# Altium PCB LTD-SX1280 CPU V1.0.PcbDoc
Units mm, origin at the board's own origin, x right, y up, seen from the top; angles counter-clockwise.
Board outline 101.73 x 68.33 mm, 2 copper layers (Top Layer, Bottom Layer); 63 components, 80 nets, 279 pads, 92 vias.
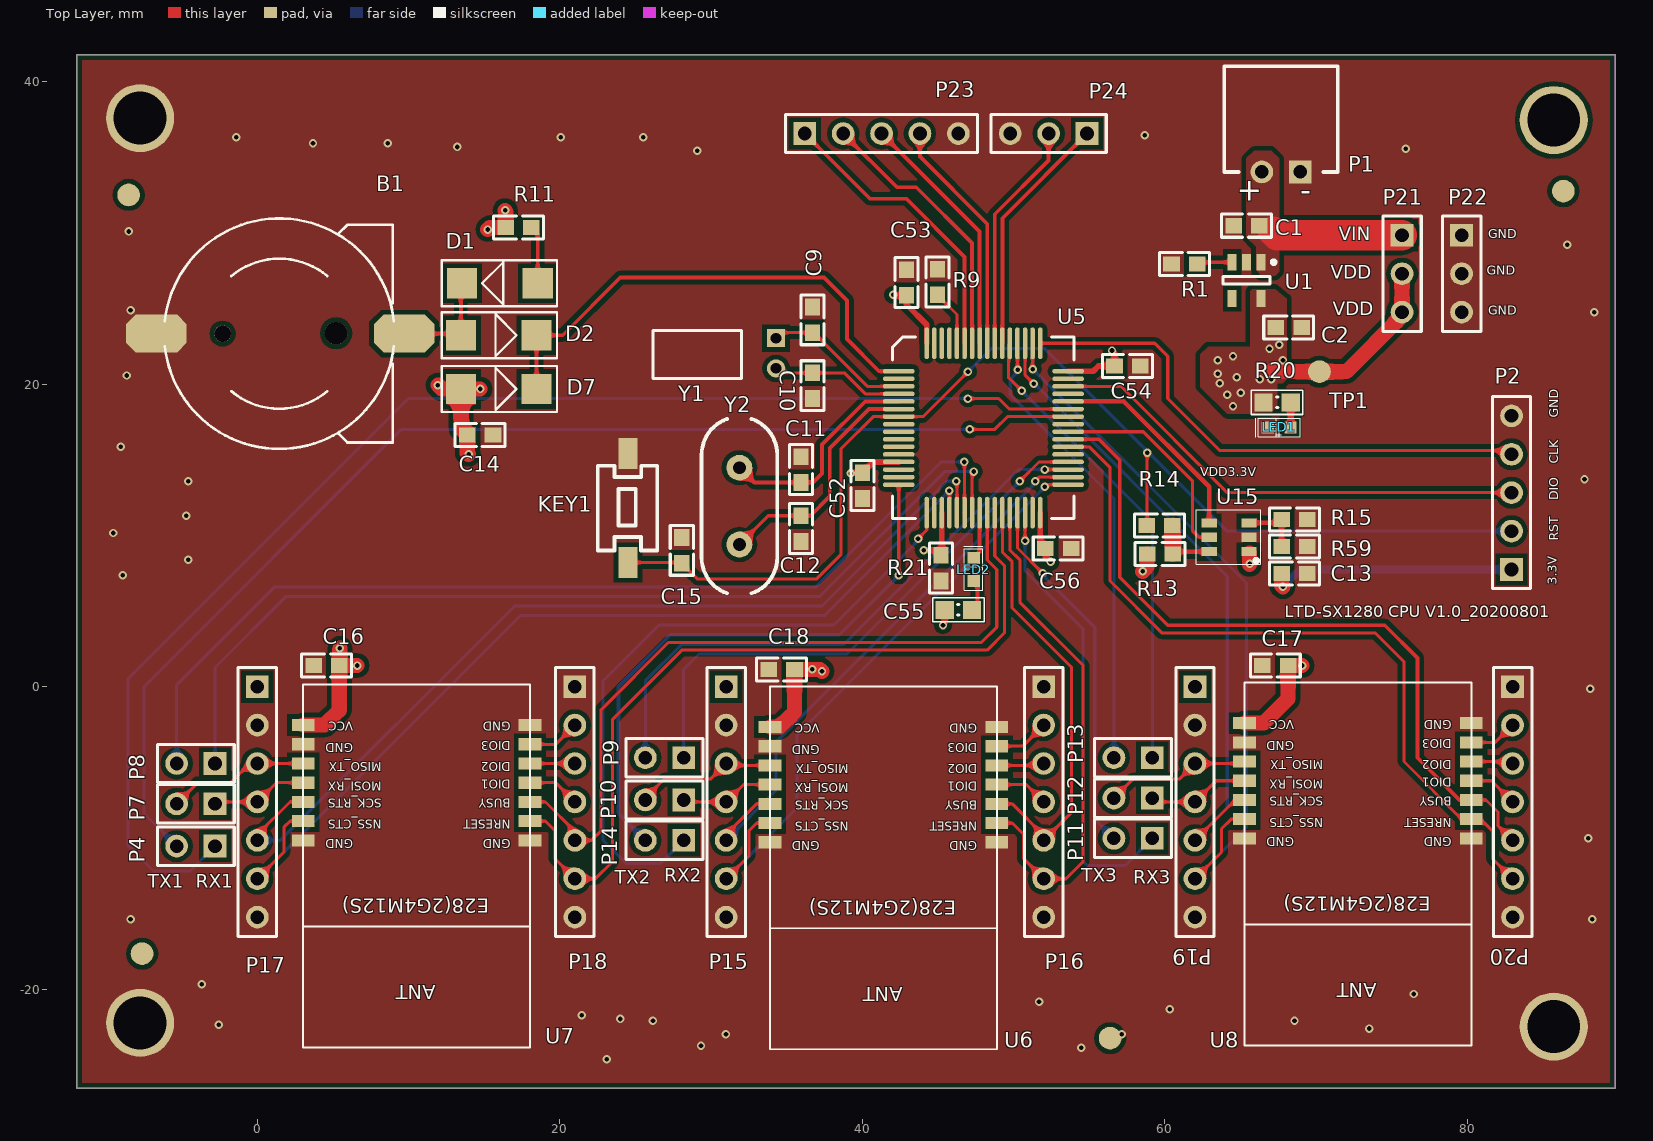
[diagram p0: Top Layer view]
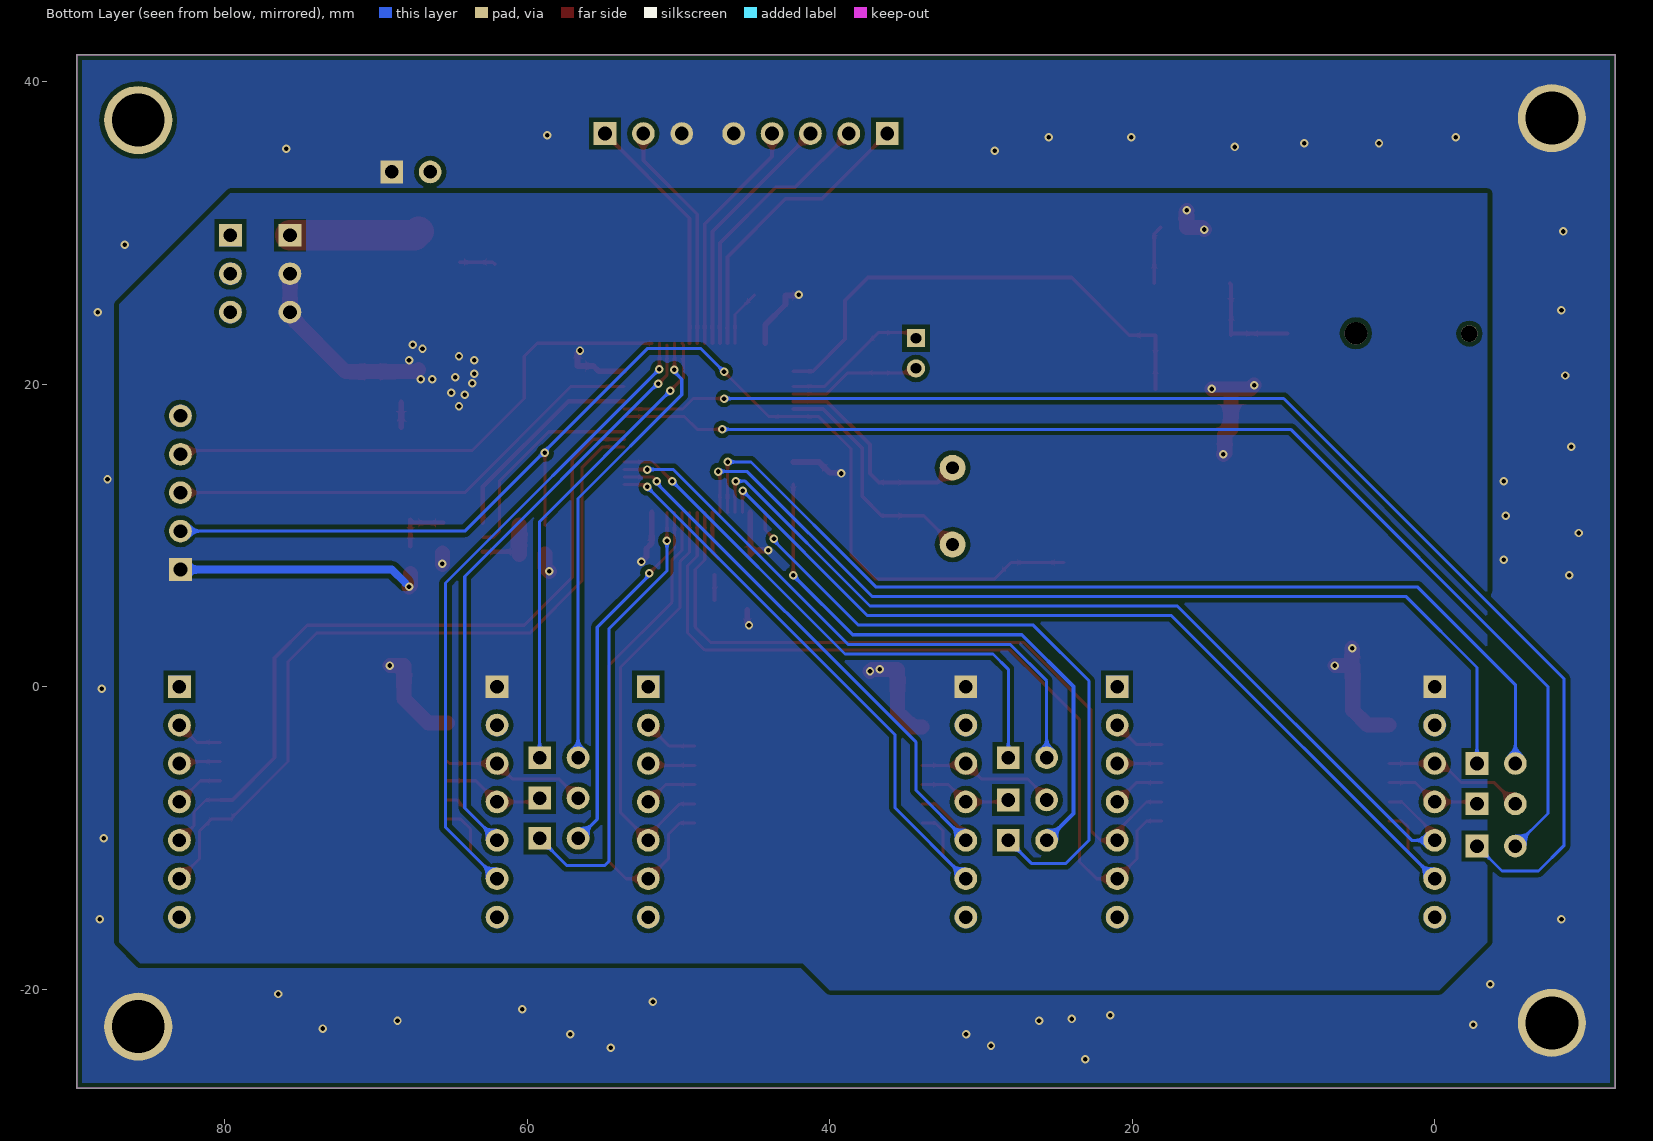
[diagram p1: Bottom Layer view, seen from below]

## Layer stack, top to bottom
Top Solder: solder mask 0.0102, Solder Resist, Dk 3.5
Top Layer: signal copper 0.0356
Dielectric1: core 0.32, FR-4, Dk 4.8
Bottom Layer: signal copper 0.0356
Bottom Solder: solder mask 0.0102, Solder Resist, Dk 3.5

## Board outline
-11.938,-26.543 -11.938,41.783 89.789,41.783 89.789,-26.543

## Design rules (kind name [scope] priority, off if disabled: settings)
Clearance [All] p1: gap=0.1 ignorepadtopadclearanceinfootprint=FALSE except(0: Arc-Hole Track-Hole SMDPad-Hole THPad-Hole Via-Hole Fill-Hole Poly-Hole Region-Hole Text-Hole)
ComponentClearance [All] p1: gap=0 collisioncheckmode=3 verticalgap=0 showdistances=FALSE
HoleSize [All] p1: absolutevalues=TRUE maxlimit=5.08 minlimit=0.025 maxpercent=80.000 minpercent=20.000
HoleToHoleClearance [All] p1: gap=0 allowstackedmicrovias=TRUE
MinimumSolderMaskSliver [All] p1: minsoldermaskwidth=0
PlaneConnect [All] p1: planeconnectstyle=Direct reliefexpansion=0.508 reliefentries=4 reliefconductorwidth=0.254 reliefairgap=0.254
PolygonConnect PolygonConnect_1 [isvia] p1: connectstyle=Direct reliefconductorwidth=0.254 reliefentries=4 polygonreliefangle="90 Angle" airgapwidth=0.254
PolygonConnect [All] p2: connectstyle=Direct reliefconductorwidth=0.254 reliefentries=4 polygonreliefangle="90 Angle" airgapwidth=0.254
RoutingVias [All] p1: holewidth=0.711 width=1.27 viastyle="Through Hole" minholewidth=0.711 minwidth=1.27 maxholewidth=0.711 maxwidth=1.27
SilkToSilkClearance [All] p1: silktosilkclearance=0
SilkToSolderMaskClearance [IsPad] p1: minsilkscreentomaskgap=0 clearancetoexposedcopper=TRUE
SolderMaskExpansion [All] p1: expansion=0.102 istentingtop=FALSE
Width [All] p1: maxlimit=2.54 minlimit=0.203 preferedwidth=0.203 minimp=50.000000 maximp=50.000000 favimp=50.000000
23 further rules are at their usual default settings.

## Classes and differential pairs
component class POWER: C1 C2 P1 R1 TP1 U1
component class CPU: B1 C9 C10 C11 C12 C13 C14 C15 C52 C53 C54 C55 C56 D1 D2 D7 KEY1 LED1 LED2 P2 P21 P22 P23 P24 R9 R11 R13 R14 R15 R20 R21 R59 U5 U15 Y1 Y2
component class IO&RF: C16 C17 C18 P4 P7 P8 P9 P10 P11 P12 P13 P14 P15 P16 P17 P18 P19 P20 U6 U7 U8

## Components (designator, comment, footprint, x,y, rotation, side; value= is the part's Value field where it differs from the comment)
B1 "*" LI1220_1 1.457,23.343 r0 top
C1 "1uF/0603/25V" 0603 65.405,30.48 r180 top
C2 "10uF/0603/16V" 0603 68.199,23.749 r0 top
C9 "12pF/0603/50V" 0603 36.703,24.257 r270 top
C10 "12pF/0603/50V" 0603 36.703,19.9 r90 top
C11 "22pF/0603/50V" 0603 35.941,14.351 r270 top
C12 "22pF/0603/50V" 0603 35.941,10.453 r90 top
C13 "0.1uF/0603/50V" 0603 68.58,7.493 r0 top
C14 "0.1uF/0603/50V" 0603 14.732,16.637 r180 top
C15 "0.1uF/0603/50V" 0603 28.067,9.017 r270 top
C16 "0.1uF/0603/50V" 0603 4.572,1.397 r0 top
C17 "0.1uF/0603/50V" 0603 67.31,1.397 r180 top
C18 "0.1uF/0603/50V" 0603 34.671,1.143 r180 top
C52 "0.1uF/0603/50V" 0603 40.005,13.296 r90 top
C53 "0.1uF/0603/50V" 0603 42.933,26.721 r270 top
C54 "0.1uF/0603/50V" 0603 57.531,21.209 r180 top
C55 "0.1uF/0603/50V" 0603 45.219,7.837 r90 top
C56 "0.1uF/0603/50V" 0603 52.959,9.144 r180 top
D1 "B240A/DO-214AC" DO-214AC 18.542,26.67 r180 top
D2 "B240A/DO-214AC" DO-214AC 13.462,23.241 r0 top
D7 "B240A/DO-214AC" DO-214AC 13.462,19.685 r0 top
KEY1 "*" KEY-3X6mm 24.511,11.811 r270 top
LED1 "LED-RED" LED-0603 67.564,17.145 r180 top
LED2 "LED-RED" LED-0603 47.371,7.747 r90 top
P1 "BAT" 白色连接器2.54 68.961,34.036 r180 top
P2 "*" HDR1X5 82.931,7.747 r90 top
P4 "Header 2" HDR1X2 -2.794,-10.541 r180 top
P7 "Header 2" HDR1X2 -2.794,-7.747 r180 top
P8 "Header 2" HDR1X2 -2.794,-5.08 r180 top
P9 "Header 2" HDR1X2 28.194,-4.699 r180 top
P10 "Header 2" HDR1X2 28.194,-7.493 r180 top
P11 "Header 2" HDR1X2 59.182,-10.033 r180 top
P12 "Header 2" HDR1X2 59.182,-7.366 r180 top
P13 "Header 2" HDR1X2 59.182,-4.699 r180 top
P14 "Header 2" HDR1X2 28.194,-10.16 r180 top
P15 "Header 7" HDR1X7 31,0 r270 top
P16 "Header 7" HDR1X7 52,0 r270 top
P17 "Header 7" HDR1X7 0,0 r270 top
P18 "Header 7" HDR1X7 21,0 r270 top
P19 "Header 7" HDR1X7 62,0 r270 top
P20 "Header 7" HDR1X7 83,0 r270 top
P21 "Header 3" HDR1X3 75.692,29.845 r270 top
P22 "Header 3" HDR1X3 79.629,29.845 r270 top
P23 "Header 3" HDR1X3 54.864,36.576 r180 top
P24 "*" HDR1X5 36.195,36.576 r0 top
R1 "10K/0603/1%" 0603 61.302,27.94 r0 top
R9 "510R/0603/1%" 0603 44.965,26.76 r90 top
R11 "10K/0603/1%" 0603 17.272,30.353 r0 top
R13 "100k/0603/1%" 0603 59.69,8.763 r180 top
R14 "0R/0603/1%" 0603 59.651,10.668 r0 top
R15 "340k/0603/1%" 0603 68.58,11.049 r180 top
R20 "1K" R-0603 67.437,18.796 r0 top
R21 "1K" R-0603 46.355,5.08 r0 top
R59 "340k/0603/1%" 0603 68.58,9.271 r180 top
TP1 "TP-1.2mm" TP-1.2MM 70.231,20.828 r0 top
U1 "TPS76933DBVT" TI-DBV5_N 65.405,26.867 r270 top
U5 "STM32L476RGT6" LQFP-64-10X10-0.5 48.013,17.108 r0 top locked
U6 "SX1280" PE28(2G4M12S) 41.402,-6.477 r270 top
U7 "SX1280" PE28(2G4M12S) 10.534,-6.35 r270 top
U8 "SX1280" PE28(2G4M12S) 72.771,-6.223 r270 top
U15 "TPL5010/SOT23" SOT23-6 64.196,9.882 r180 top
Y1 "32.768kHZ" 32.768K 34.297,23.045 r0 top
Y2 "8MHZ-5032" XAL 31.877,9.398 r270 top

## Footprints (in the part's own frame and the unit in brackets; to place one, negate y for a bottom-side part, rotate by r counter-clockwise, add the part's x,y. Pads: shape width x height; smd on the part's side, far side on the other; paste and mask are expansions set on the pad)
32.768K [mm]
  rect 1.2x1.2 / inner round 1.2 / far side rect 1.2x1.2 hole 0.7: 1(0,0)
  round 1.2 hole 0.7: 2(0,-2)
  silkscreen extent -8.13,-2.67 -2.29,0.51
0603 [mm] "Chip Resistor; Body 1.6 x 0.8 mm (LxW typ)"
  rect 1.1x1 smd: 1(-0.85,0) 2(0.85,0)
  silkscreen extent -1.65,-0.76 1.65,0.76
DO-214AC [mm]
  rect 2x2 smd: 1(0,0) 2(5,0)
  silkscreen extent -1.27,-1.52 6.35,1.52
HDR1X2 [mm] "Connector; Header; 2 Position"
  rect 1.5x1.5 hole 0.9: 1(0,0)
  round 1.5 hole 0.9: 2(2.54,0)
  silkscreen extent -1.27,-1.27 3.81,1.27
HDR1X3 [mm] "Connector; Header; 3 Position"
  rect 1.5x1.5 hole 0.9: 1(0,0)
  round 1.5 hole 0.9: 2(2.54,0) 3(5.08,0)
  silkscreen extent -1.27,-1.27 6.35,1.27
HDR1X5 [mm] "Connector; Header; 5 Position"
  rect 1.5x1.5 hole 0.9: 1(0,0)
  round 1.5 hole 0.9: 2(2.54,0) 3(5.08,0) 4(7.62,0) 5(10.16,0)
  silkscreen extent -1.27,-1.27 11.43,1.27
HDR1X7 [mm] "Connector; Header; 7 Position"
  rect 1.5x1.5 hole 0.9: 1(0,0)
  round 1.5 hole 0.9: 2(2.54,0) 3(5.08,0) 4(7.62,0) 5(10.16,0) 6(12.7,0) 7(15.24,0)
  silkscreen extent -1.27,-1.27 16.51,1.27
KEY-3X6mm [mm] "3X6mm"
  rect 2.032x1.27 smd: 1(-3.6,0) 2(3.6,0)
  silkscreen extent -2.8,-2 2.8,1.94, body extent -3.54,-1.83 3.48,1.87, height 2.5
LED-0603 [mm] "1.6*0.8mm"
  rect 0.8x0.8 smd: 1(-0.75,0) 2(0.75,0)
  silkscreen extent -1.38,-0.61 1.55,0.65
LI1220_1 [mm]
  round 1.1 hole 1.1 unplated: 0(-3.75,0)
  round 1.5 hole 1.5 unplated: 0(3.75,0.025)
  oct 4x2.5 smd: 1(8.255,0) 2(-8.128,0)
  silkscreen extent -7.57,-7.62 7.57,7.62
LQFP-64-10X10-0.5 [mm] "Pinch=0.5mm,Height=1.6mm,Body=10X10mm"
  oval 2.1x0.3 smd: 1(-5.6,3.75) 2(-5.6,3.25) 3(-5.6,2.75) 4(-5.6,2.25) 5(-5.6,1.75) 6(-5.6,1.25) 7(-5.6,0.75) 8(-5.6,0.25) 9(-5.6,-0.25) 10(-5.6,-0.75) 11(-5.6,-1.25) 12(-5.6,-1.75) 13(-5.6,-2.25) 14(-5.6,-2.75) 15(-5.6,-3.25) 16(-5.6,-3.75) 33(5.6,-3.75) 34(5.6,-3.25) 35(5.6,-2.75) 36(5.6,-2.25) 37(5.6,-1.75) 38(5.6,-1.25) 39(5.6,-0.75) 40(5.6,-0.25) 41(5.6,0.25) 42(5.6,0.75) 43(5.6,1.25) 44(5.6,1.75) 45(5.6,2.25) 46(5.6,2.75) 47(5.6,3.25) 48(5.6,3.75)
  oval 0.3x2.1 smd: 17(-3.75,-5.6) 18(-3.25,-5.6) 19(-2.75,-5.6) 20(-2.25,-5.6) 21(-1.75,-5.6) 22(-1.25,-5.6) 23(-0.75,-5.6) 24(-0.25,-5.6) 25(0.25,-5.6) 26(0.75,-5.6) 27(1.25,-5.6) 28(1.75,-5.6) 29(2.25,-5.6) 30(2.75,-5.6) 31(3.25,-5.6) 32(3.75,-5.6) 49(3.75,5.6) 50(3.25,5.6) 51(2.75,5.6) 52(2.25,5.6) 53(1.75,5.6) 54(1.25,5.6) 55(0.75,5.6) 56(0.25,5.6) 57(-0.25,5.6) 58(-0.75,5.6) 59(-1.25,5.6) 60(-1.75,5.6) 61(-2.25,5.6) 62(-2.75,5.6) 63(-3.25,5.6) 64(-3.75,5.6)
  silkscreen extent -6,-6 6,6, body extent -6.07,-6.07 6.07,6.07, height 1.63
PE28(2G4M12S) [mm] "24mm*15mm*2.85mm-S"
  rect 0.8x1.5 smd: 1(-3.81,-7.5) 2(-2.54,-7.5) 3(-1.27,-7.5) 4(0,-7.5) 5(1.27,-7.5) 6(2.54,-7.5) 7(3.81,-7.5) 8(3.81,7.5) 9(2.54,7.5) 10(1.27,7.5) 11(0,7.5) 12(-1.27,7.5) 13(-2.54,7.5) 14(-3.81,7.5)
  silkscreen extent -6.5,-7.5 17.5,7.5
R-0603 [mm] "Chip, 2-Leads, Body 1.60x0.80mm, IPC Medium Density"
  rect 1.2x1.2 smd: 1(-0.9,0) 2(0.9,0)
  silkscreen extent -1.7,-0.8 1.7,0.8, body extent -0.8,-0.4 0.8,0.4, height 0.8
SOT23-6 [mm]
  rect 1x0.6 smd: 1(-1.375,0.95) 2(-1.375,0) 3(-1.375,-0.95) 4(1.255,-0.95) 5(1.255,0) 6(1.255,0.95)
  silkscreen extent -2.13,-1.8 2.12,1.8, body extent -0.88,-1.52 0.88,1.53, height 1.1
TI-DBV5_N [mm] "SOT23, 5-Leads, Body 2.9x1.6mm, Pitch 0.95mm, IPC Medium Density"
  rect 1.1x0.6 smd: 1(-1.2,0.95) 2(-1.2,0) 3(-1.2,-0.95) 4(1.2,-0.95) 5(1.2,0.95)
  silkscreen extent -1.32,-1.55 0.25,1.93, body extent -0.88,-1.52 0.87,1.53, height 1.45
TP-1.2MM [mm]
  round 1.5 smd: 1(0,0)
XAL [mm]
  round 1.708 hole 0.854: 1(0,0) 2(-5.08,0)
  silkscreen extent -8.31,-2.5 3.23,2.5
白色连接器2.54 [mm]
  rect 1.5x1.5 hole 0.9: 1(0,0)
  round 1.5 hole 0.9: 2(2.54,0)
  silkscreen extent -2.48,-6.98 5.02,0

## Part data
B1: library part VBAT
C1 C2 C9 C10 C11 C12 C13 C16: library part CAP, "Capacitor"
C14 C15 C17 C18 C52 C53 C54 C55 C56: library part Cap, "Capacitor"
D1 D2 D7: library part DIODE, "Diode"
KEY1: library part SW-PB, "Switch"
LED1 LED2: library part LED-RED-0603, "LED-RED,5V,30mA,90mW,1.6*0.8mm"
P1: library part "Header 2", "Header, 2-Pin"
P2 P24: library part "Header 5", "Header, 5-Pin"
P4 P7 P8 P9 P10 P11 P12 P13 P14: "Header, 2-Pin"
P15 P16 P17 P18 P19 P20: "Header, 7-Pin"
P21 P22 P23: "Header, 3-Pin"
R1 R13 R14 R15 R59: library part RES
R9: library part RES, "Resistor"
R11: library part "Res Semi", "Semiconductor Resistor"
R20 R21: library part RES-1K-1%-0603, "RES,1K,1/10W,1%,0603"
U1: "Single Output LDO, 100 mA, Fixed 3.3 V Output, 2.7 to 10 V Input, with Low IQ, 5-pin SOT-23 (DBV), -40 to 125 degC, Green (RoHS & no Sb/Br)"
U5: library part STM32L476R
U15: library part TPL5
Y1 Y2: library part CRYSTAL, "Crystal"

## Free pads (board coordinates)
  round 1.5 smd: 0(-8.509,32.512) 1(-7.62,-17.653) 2(86.36,32.766) 3(56.388,-23.241)
  round 4.5 hole 3.5: 0(-7.747,-22.225) 0(-7.747,37.592) 0(85.725,-22.479) 0(85.725,37.465)

## Via types
v1: diameter 0.559, hole 0.305, Top Layer to Bottom Layer, tented both sides, 92 vias

## Nets (pads, with @x,y where several pads share a name; then routed paths per layer and width w, separated by ;. In a path a pad name is that pad's centre, name@x,y a point inside that pad or via, vN(x,y) a via of type N, cw(c..) or ccw(c..) an arc to the next point about the centre after c; other vN are vias at no path point)
5V_EN: U5.45
AE_ADC: U5.10
BUSY1: P18.5 U5.25 U7.10 | length 50.6
  Top Layer w0.203: U7.10 19.05,-7.62 21,-9.57 P18.5 22.098,-10.16 22.733,-9.525 22.733,-1.524 27.178,2.921 47.879,2.921 48.895,3.937 48.895,7.747 48.263,8.379 U5.25
BUSY2: P16.5 U5.27 U6.10 | length 28.6
  Top Layer w0.203: U6.10 49.911,-7.747 52,-9.836 P16.5 53.848,-8.312 53.848,1.27 49.911,5.207 49.911,8.255 49.263,8.903 U5.27
BUSY3: P20.5 U5.39 U8.10 | length 49.3
  Top Layer w0.203: U8.10 81.244,-7.493 82.042,-8.291 82.042,-9.202 P20.5
  Top Layer w0.254: U5.39 55.651,16.358 57.023,14.986 57.023,7.239 60.198,4.064 74.549,4.064 76.708,1.905 76.708,-4.699 79.502,-7.493 U8.10
DI01: P16.4 U6.11 | length 3.6
  Top Layer w0.203: U6.11 50.857,-6.477 P16.4
DI02: P16.3 U6.12 | length 3.2
  Top Layer w0.203: U6.12 51.873,-5.207 P16.3
DI03: P16.2 U6.13 | length 3.7
  Top Layer w0.203: U6.13 50.603,-3.937 P16.2
DI04: P18.4 U7.11 | length 3.5
  Top Layer w0.203: U7.11 19.73,-6.35 P18.4
DI05: P18.3 U7.12 | length 3
  Top Layer w0.203: U7.12 P18.3
DI06: P18.2 U7.13 | length 3.5
  Top Layer w0.203: U7.13 19.73,-3.81 P18.2
DI07: P20.4 U8.11 | length 3.3
  Top Layer w0.203: U8.11 81.603,-6.223 P20.4
DI08: P20.3 U8.12 | length 2.8
  Top Layer w0.203: U8.12 82.873,-4.953 P20.3
DI09: P20.2 U8.13 | length 3.2
  Top Layer w0.203: U8.13 81.857,-3.683 P20.2
EEPROM_POWER_ON: U5.37
GND: B1.2 C1.2 C2.2 C9.1 C10.1 C11.1 C12.1 C13.2 C14.1 C15.1 C16.1 C17.2 C18.2 C52.1 C53.1 C54.1 C55.1 C56.1 KEY1.1 LED1.2 P1.1 P2.5 P15.2 P15.7 P16.1 P16.7 P17.2 P17.7 P18.1 P18.7 P19.2 P19.7 P20.1 P20.7 P22.1 P22.2 P22.3 P23.3 P24.5 pad.0@85.725,-22.479 pad.0@-7.747,37.592 pad.0@-7.747,-22.225 R1.1 R9.2 R15.1 R59.1 U1.2 U5.12 U5.18 U5.31 U5.47 U5.63 U6.2 U6.7 U6.8 U6.14 U7.2 U7.7 U7.8 U7.14 U8.2 U8.7 U8.8 U8.14 U15.2
  other v1: 23.114,-24.638 54.483,-23.876 29.337,-23.749 30.988,-22.987 57.15,-22.987 73.533,-22.606 -2.54,-22.352 26.162,-22.098 68.58,-22.098 24.003,-21.971 21.463,-21.717 60.325,-21.336 51.689,-20.828 76.454,-20.32 -3.683,-19.685 -8.382,-15.367 88.265,-15.367 88.011,-10.033 88.138,-0.127 -8.89,7.366 -4.572,8.382 -9.525,10.16 -4.699,11.303 -4.572,13.589 87.757,13.716 -9.017,15.875 -8.636,20.574 88.392,24.765 -8.382,24.892 86.614,29.21 -8.509,30.099 29.083,35.433 75.946,35.56 13.208,35.687 3.683,35.941 8.636,35.941 -1.397,36.322 20.066,36.322 25.527,36.322 58.674,36.449
KEY_START: U5.2
KEY_STOP: U5.14
LED: LED2.2 U5.24 | length 3.2
  Top Layer w0.254: LED2.2 47.763,8.889 U5.24
LORA_AT: U5.62
MCU_3.3V: C2.1 C13.1 C14.2 C16.2 C17.1 C18.1 C52.2 C53.2 C54.2 C55.2 C56.2 D7.1 P2.1 P15.1 P17.1 P19.1 P21.2 P21.3 R11.1 R13.2 R20.1 R21.1 TP1.1 U1.5 U5.13 U5.19 U5.32 U5.48 U5.64 U6.1 U7.1 U8.1 U15.1 | length 83.5
  Top Layer w0.381: v1(39.243,14.097) 39.292,14.146 C52.2 40.717,14.858 U5.13 ; v1(42.037,25.908) 42.074,25.871 C53.2 42.933,25.266 44.263,23.936 U5.64 ; v1(44.069,9.017) 44.977,9.017 45.263,8.731 U5.19 ; v1(45.339,4.064) 45.455,4.18 R21.1 ; U5.32 51.763,9.49 C56.2 52.109,8.597 v1(52.451,8.255) ; U5.48 55.275,20.858 55.626,21.209 C54.2 56.681,22.059 v1(56.515,22.225)
  Top Layer w1: U7.1 4.445,-2.54 5.422,-1.563 C16.2 ; v1(5.461,2.54) 5.461,1.436 C16.2 ; v1(6.604,1.397) C16.2 ; v1(11.938,19.939) 12.192,19.685 D7.1 ; v1(13.97,15.367) 13.882,15.455 C14.2 13.462,17.057 D7.1 ; v1(14.732,19.685) D7.1 ; v1(15.24,30.226) 15.367,30.353 R11.1 16.422,31.457 v1(16.383,31.496) ; U6.1 34.544,-2.667 35.521,-1.69 C18.1 37.211,1.143 v1(37.338,1.016) ; v1(58.547,7.62) 58.84,7.913 R13.2 ; U8.1 66.548,-2.413 68.16,-0.801 C17.1 v1(69.088,1.397) ; v1@65.61,8.082 U15.1@65.61,8.847 ; 67.183,20.955 67.31,20.828 TP1.1 72.009,20.828 75.692,24.511 P21.3 P21.2 ; C13.1 67.73,6.692 v1(67.818,6.604)
  Bottom Layer w0.508: 68.072,6.858 68.961,7.747 P2.1
  other v1: 36.703,1.143 65.61,8.128 64.516,18.542 64.135,19.304 65.024,19.431 63.627,20.066 66.294,20.32 67.056,20.32 64.77,20.447 63.5,20.701 63.5,21.59 67.818,21.59 64.516,21.844 66.929,22.352 67.564,22.606
MISI_RX1: P7.1 P17.4 U7.4 | length 6.4
  Top Layer w0.203: P7.1 -2.667,-7.62 P17.4 1.27,-6.35 U7.4
MISI_RX2: P10.1 P15.4 U6.4 | length 6.2
  Top Layer w0.203: P10.1 28.321,-7.62 P15.4 32.143,-6.477 U6.4
MISI_RX3: P12.1 P19.4 U8.4 | length 6.8
  Top Layer w0.203: P12.1@59.055,-7.62 P19.4 63.397,-6.223 U8.4
MISO_TX1: P7.2 P17.3 U7.3 | length 9.5
  Top Layer w0.203: P7.2 -3.937,-6.35 -1.778,-6.35 -0.508,-5.08 P17.3 U7.3
MISO_TX2: P10.2 P15.3 U6.3 | length 9.4
  Top Layer w0.203: P10.2 25.654,-7.366 26.924,-6.096 29.984,-6.096 P15.3 31.127,-5.207 U6.3
MISO_TX3: P12.2 P19.3 U8.3 | length 9.6
  Top Layer w0.203: P12.2 57.912,-6.096 60.984,-6.096 P19.3 65.144,-5.08 U8.3
NetB1_1: B1.1 D1.2 D2.1 | length 7.3
  Top Layer w0.254: B1.1 13.36,23.343 D2.1 13.462,26.59 D1.2
NetC9_2: C9.2 U5.3 Y1.1 | length 9.7
  Top Layer w0.203: Y1.1 34.659,23.407 C9.2 36.791,23.407 40.34,19.858 U5.3
NetC10_2: C10.2 U5.4 Y1.2 | length 8.8
  Top Layer w0.203: Y1.2 34.592,20.75 C10.2 38.813,20.75 40.205,19.358 U5.4
NetC11_2: C11.2 U5.5 Y2.2 | length 14.3
  Top Layer w0.254: Y2.2 32.854,13.501 C11.2 36.742,13.501 37.338,14.097 37.338,16.002 40.194,18.858 U5.5
NetC12_2: C12.2 U5.6 Y2.1 | length 16.1
  Top Layer w0.254: Y2.1 33.782,11.303 C12.2 36.576,11.303 37.846,12.573 37.846,15.748 40.456,18.358 U5.6
NetD1_1: D1.1 R11.2 | length 3.9
  Top Layer w0.254: R11.2 18.542,29.933 D1.1
NetLED1_1: LED1.1 R20.2 | length 1.6
  Top Layer w0.381: LED1.1@68.337,17.168 R20.2
NetLED2_1: LED2.1 R21.2 | length 1.6
  Top Layer w0.254: 47.625,5.737 LED2.1@47.625,7.378
NetR1_2: R1.2 U1.3 | length 2.4
  Top Layer w0.254: R1.2 62.279,28.067 U1.3
NetR9_1: R9.1 U5.60 | length 3.7
  Top Layer w0.203: R9.1 46.263,24.612 U5.60
NetR13_1: R13.1 R14.2 U15.6 | length 4.4
  Top Layer w0.3: R13.1 60.709,8.932 U15.6
  Top Layer w1.016: R13.1 R14.2@60.54,10.668
NetR15_2: R15.2 R59.2 U15.3 | length 4
  Top Layer w0.3: U15.3 67.513,10.832 R15.2 R59.2
NetU1_4: U1.4
NetU5_8: U5.8
NetU5_15: U5.15
NetU5_41: U5.41
NetU5_61: U5.61
NRESET: C15.2 KEY1.2 P2.2 R14.1 U5.7 | length 79.1
  Top Layer w0.203: KEY1.2 28.023,8.211 C15.2 29.122,7.112 36.957,7.112 38.608,8.763 38.608,15.748 40.718,17.858 U5.7 44.02,17.858 v1(46.99,20.828) ; R14.1 58.84,10.707 v1(58.84,15.455) v1@58.801,15.494
  Bottom Layer w0.203: v1(46.99,20.828) 48.514,22.352 52.07,22.352 64.135,10.287 P2.2
PB2: P23.1 U5.54 | length 16.2
  Top Layer w0.254: U5.54 49.263,30.975 P23.1
PB3: P23.2 U5.55 | length 15.3
  Top Layer w0.254: U5.55 48.763,31.237 52.324,34.798 P23.2
PB4: P24.4 U5.56 | length 15.7
  Top Layer w0.254: P24.4 43.815,35.052 48.263,30.604 U5.56
PB5: P24.3 U5.57 | length 16.6
  Top Layer w0.254: P24.3 47.763,30.088 U5.57
PB6: P24.2 U5.58 | length 18.1
  Top Layer w0.254: P24.2 42.291,33.02 43.568,33.02 47.263,29.325 U5.58
PB7: P24.1 U5.59 | length 19.7
  Top Layer w0.254: P24.1 40.513,32.258 42.926,32.258 46.763,28.421 U5.59
REST1: P18.6 U5.26 U7.9 | length 54.5
  Top Layer w0.203: U7.9 19.05,-8.89 19.685,-9.525 19.685,-11.385 P18.6 22.352,-12.7 23.495,-11.557 23.495,-2.159 28.067,2.413 48.26,2.413 49.403,3.556 49.403,8.001 48.763,8.641 U5.26
REST2: P16.6 U5.28 U6.9 | length 33.7
  Top Layer w0.203: U6.9 49.911,-9.017 50.673,-9.779 50.673,-11.373 P16.6 53.467,-12.7 54.61,-11.557 54.61,1.397 50.419,5.588 50.419,8.382 49.763,9.038 U5.28
REST3: P20.6 U5.38 U8.9 | length 50.5
  Top Layer w0.203: U5.38 55.008,15.858 56.388,14.478 56.388,6.985 59.838,3.535 73.935,3.535 75.819,1.651 75.819,-4.953 79.629,-8.763 U8.9 80.891,-8.763 81.661,-9.533 81.661,-11.361 P20.6
SPI1_CLK: P17.5 U5.21 U7.5 | length 62.5
  Top Layer w0.203: P17.5 0,-9.779 2.159,-7.62 U7.5 ; U5.21 v1@46.263,13.589
  Bottom Layer w0.203: P17.5 1.524,-10.16 17.018,5.334 37.338,5.334 45.593,13.589 v1(46.228,13.589)
SPI1_MISO: P8.2 U5.22 | length 66.8
  Top Layer w0.203: U5.22@46.736,11.535 U5.22 46.763,14.832 v1(46.736,14.859)
  Bottom Layer w0.203: P8.2 -5.334,0.127 1.143,6.604 36.957,6.604 45.212,14.859 v1(46.736,14.859)
SPI1_MOSI: P8.1 U5.23 | length 64.6
  Top Layer w0.203: U5.23 47.263,14.116 v1(47.371,14.224)
  Bottom Layer w0.203: P8.1 -2.794,1.27 1.905,5.969 37.211,5.969 45.478,14.236 v1@47.371,14.236
SPI1_NSS: P17.6 U5.20 U7.6 | length 63.4
  Top Layer w0.203: P17.6 1.778,-10.922 1.778,-9.271 2.159,-8.89 U7.6 ; U5.20 v1(45.763,12.954)
  Bottom Layer w0.203: P17.6 17.399,4.699 37.508,4.699 v1(45.763,12.954)
SPI2_CLK: P15.5 U5.34 U6.5 | length 38.6
  Top Layer w0.203: P15.5 31,-9.767 33.02,-7.747 U6.5 ; v1(51.435,13.589) 51.704,13.858 U5.34
  Bottom Layer w0.203: P15.5 34.29,-6.87 34.29,-3.683 v1@51.499,13.525
SPI2_MISO: P9.2 U5.35 | length 38.8
  Top Layer w0.203: v1(52.07,14.358) U5.35
  Bottom Layer w0.203: P9.2 25.654,0.381 28.067,2.794 38.78,2.794 50.344,14.358 v1(52.07,14.358)
SPI2_MOSI: P9.1 U5.36 | length 36.9
  Top Layer w0.203: v1(50.419,13.589) 51.688,14.858 U5.36
  Bottom Layer w0.203: P9.1 28.194,1.143 29.21,2.159 38.989,2.159 v1(50.419,13.589)
SPI2_NSS: P15.6 U5.33 U6.6 | length 41.8
  Top Layer w0.203: P15.6 32.512,-11.188 32.512,-9.525 33.02,-9.017 U6.6 ; v1(52.07,13.208) 52.22,13.358 U5.33
  Bottom Layer w0.203: P15.6 35.687,-8.013 35.687,-3.175 v1@52.197,13.335
SPI3_CLK: P19.5 U5.51 U8.5 | length 43.6
  Top Layer w0.203: U5.51@50.763,22.581 50.773,22.571 50.773,20.601 v1(51.345,20.029) ; P19.5 64.667,-7.493 U8.5
  Bottom Layer w0.203: v1@51.369,20.053 64.135,7.287 64.135,-8.025 P19.5
SPI3_MISO: P13.2 U5.52 | length 30.4
  Top Layer w0.203: v1@50.263,20.984 U5.52
  Bottom Layer w0.203: v1(50.292,20.955) 50.292,20.828 49.784,20.32 49.784,19.304 56.642,12.446 P13.2
SPI3_MOSI: P13.1 U5.53 | length 31.4
  Top Layer w0.203: U5.53 49.684,22.629 49.684,20.42 v1@50.673,19.431
  Bottom Layer w0.203: v1@50.673,19.431 59.182,10.922 P13.1
  other v1: 50.546,19.558
SPI3_NSS: P19.6 U5.50 U8.6 | length 48.4
  Top Layer w0.203: v1(51.263,21) U5.50 ; P19.6 63.754,-10.946 63.754,-9.398 64.389,-8.763 U8.6
  Bottom Layer w0.203: v1@51.308,20.955 65.405,6.858 65.405,-9.295 P19.6
SWCLK: P2.4 U5.49 | length 35.7
  Top Layer w0.203: U5.49 59.334,22.708 60.198,21.844 60.198,19.05 63.628,15.62 P2.4@82.931,15.62
SWDIO: P2.3 U5.46 | length 32.5
  Top Layer w0.203: U5.46 57.104,19.858 64.135,12.827 65.913,12.827 ; 65.659,12.827 P2.3
TEV_ADC: U5.11
USART1_RX: P4.1 U5.43 | length 88.3
  Top Layer w0.203: v1(46.99,19.05) 49.022,19.05 49.714,18.358 U5.43
  Bottom Layer w0.203: P4.1 -4.445,-12.192 -6.858,-12.192 -8.558,-10.492 -8.558,0.507 9.985,19.05 v1(46.99,19.05)
USART1_TX: P4.2 U5.42 | length 79.9
  Top Layer w0.203: v1(47.117,17.018) 48.768,17.018 49.608,17.858 U5.42
  Bottom Layer w0.203: P4.2 -7.493,-8.382 -7.493,0 9.525,17.018 v1(47.117,17.018)
USART2_RX: P14.1 U5.17 | length 43.9
  Top Layer w0.203: v1(43.688,9.779) 44.263,10.354 U5.17
  Bottom Layer w0.203: P14.1 26.67,-11.684 24.384,-11.684 22.86,-10.16 22.86,0.381 26.543,4.064 38.1,4.064 v1@43.752,9.716
USART2_TX: P14.2 U5.16 | length 38.6
  Top Layer w0.254: v1@42.413,7.239 U5.16
  Bottom Layer w0.254: P14.2 23.876,-8.382 23.876,0 27.305,3.429 38.481,3.429 v1(42.418,7.366)
USART3_RX: P11.1 U5.30 | length 30.1
  Top Layer w0.203: v1(50.763,9.652) U5.30
  Bottom Layer w0.203: v1(50.763,9.652) 50.763,7.657 54.61,3.81 54.61,-11.557 54.864,-11.811 57.404,-11.811 P11.1
USART3_TX: P11.2 U5.29 | length 24.1
  Top Layer w0.203: U5.29 50.263,9.173 v1(51.943,7.493)
  Bottom Layer w0.203: v1@51.943,7.366 55.372,3.937 55.372,-8.763 P11.2
VBAT: D2.2 D7.2 U5.1 | length 33.1
  Top Layer w0.254: D7.2 D2.2 20.193,23.241 24.003,27.051 37.465,27.051 38.989,25.527 38.989,22.987 41.118,20.858 U5.1
VBAT_ADC: U5.9
VBATTERY: C1.1 P1.2 P21.1 U1.1 | length 8.6
  Top Layer w2: 67.183,30.099 67.437,29.845 P21.1
WDG_DONE: U5.44 U15.4 | length 14
  Top Layer w0.3: U5.44 57.291,18.858 62.941,13.208 U15.4
WDG_WAKE: U5.40 U15.5 | length 14.2
  Top Layer w0.203: U5.40 58.58,16.858 61.849,13.589 61.849,10.287 62.254,9.882 U15.5
pads on no net: B1.0

## Polygon pours and split planes (outlines as drawn)
GND on Top Layer "Signal Layer 4-No Net" (solid, remove dead copper, pour order 15): -9.779,56.388 -21.59,44.577 -21.59,40.513 -21.59,-12.192 -21.59,-25.4 -9.652,-37.338 93.091,-37.338 101.219,-29.21 101.473,-28.956 101.473,48.895 93.218,57.15 90.17,57.15
MCU_3.3V on Top Layer "Signal Layer 4-No Net" (solid, remove dead copper, pour order 9): 65.786,22.479 62.865,22.479 62.357,21.971 62.357,21.844 62.357,19.812 64.135,18.034 65.913,18.034 66.04,18.161 67.056,18.161 67.437,18.542 67.437,20.193 67.437,20.32
VBATTERY on Top Layer "Signal Layer 4-No Net" (solid, remove dead copper, pour order 3): 66.548,35.433 65.913,35.433 65.405,34.925 65.405,31.242 65.405,29.718 66.04,29.083 66.04,27.559 66.294,27.305 66.294,27.178 67.31,27.178 67.564,27.432 67.564,27.94 67.564,33.909 67.564,34.925 67.056,35.433
MCU_3.3V on Top Layer "Signal Layer 4-No Net" (solid, remove dead copper, pour order 5): 67.31,26.289 65.786,26.289 65.659,26.162 65.659,24.257 65.659,20.447 66.04,20.066 66.167,20.066 66.421,20.066 67.818,20.066 68.072,20.32 68.072,20.701 68.072,25.654
GND on Bottom Layer "Signal Layer 4-No Net" (solid, remove dead copper, pour order 22): -21.082,52.07 -21.082,-29.464 -10.795,-39.751 -10.033,-40.513 89.535,-40.513 103.251,-26.797 103.251,-24.13 103.251,45.974 98.171,51.054
MCU_3.3V on Bottom Layer "Signal Layer 4-No Net" (solid, remove dead copper, pour order 17): -3.49,32.639 -3.49,-16.891 -0.315,-20.066 40.005,-20.066 41.783,-18.288 85.598,-18.288 86.995,-16.891 86.995,-13.716 86.995,25.273 79.629,32.639

## Keep-outs
Keep-Out Layer:
  lines w0.1: -11.938,-26.543 -11.938,41.402 -11.938,41.783 89.789,41.783 89.789,-26.543 -11.938,-26.543
  lines w0.127: -203.132,22.11 cw(c-201.163,22.173) -201.227,24.142

## Other copper
Top Layer:
  region: -200.973,-208.268
  region: -200.973,-208.268
  region: -200.973,-208.268
  region: -200.973,-208.268
  region: -200.973,-208.268
  region: -200.973,-208.268
  region: -200.973,-208.268
  region: -200.973,-208.268
  region: -200.973,-208.268
  region: -200.973,-208.268
  region: -200.973,-208.268

## Silkscreen, mask and mechanical layers (free items; w line width, h text height)
Top Overlay:
  lines w0.508: -202.776,11.594 -202.776,22.72
  text "+" at 64.77,31.623 h2.54
  text "-" at 68.961,31.623 h2.54
  text "GND" at 81.407,29.464 h1.02
  text "VIN" at 71.501,29.21 h1.52
  text "GND" at 81.28,27.051 h1.02
  text "VDD" at 70.993,26.67 h1.52
  text "GND" at 81.407,24.384 h1.02
  text "VDD" at 71.12,24.257 h1.52
  text "GND" at 86.233,17.78 h1.02 r90
  text "CLK" at 86.233,14.732 h1.02 r90
  text "VDD3.3V" at 62.357,13.716 h1.02
  text "DIO" at 86.233,12.319 h1.02 r90
  text "RST" at 86.233,9.652 h1.02 r90
  text "3.3V" at 86.106,6.731 h1.02 r90
  text "LTD-SX1280 CPU V1.0_20200801" at 67.945,4.318 h1.31
  text "RX2" at 26.924,-13.208 h1.52
  text "TX3" at 54.483,-13.208 h1.52
  text "TX2" at 23.622,-13.335 h1.52
  text "RX3" at 57.912,-13.335 h1.52
  text "TX1" at -7.239,-13.589 h1.52
  text "RX1" at -4.064,-13.589 h1.52

## Text inside footprints (layer, text, board x,y; h text height)
U6: Top Overlay "ANT" at 42.665,-19.535 h1.6 r180; Top Overlay "E28(2G4M12S)" at 46.221,-13.82 h1.6 r180; Top Overlay "GND" at 47.618,-2.263 h1 r180; Top Overlay "DIO3" at 47.618,-3.533 h1 r180; Top Overlay "DIO2" at 47.618,-4.93 h1 r180; Top Overlay "DIO1" at 47.618,-6.073 h1 r180; Top Overlay "BUSY" at 47.618,-7.343 h1 r180; Top Overlay "NRESET" at 47.618,-8.74 h1 r180; Top Overlay "GND" at 47.618,-10.01 h1 r180; Top Overlay "GND" at 37.204,-10.01 h1 r180; Top Overlay "NSS_CTS" at 39.109,-8.74 h1 r180; Top Overlay "SCK_RTS" at 39.109,-7.343 h1 r180; Top Overlay "MOSI_RX" at 39.109,-6.2 h1 r180; Top Overlay "MISO_TX" at 39.109,-4.93 h1 r180; Top Overlay "GND" at 37.204,-3.66 h1 r180; Top Overlay "VCC" at 37.204,-2.263 h1 r180
U7: Top Overlay "ANT" at 11.797,-19.408 h1.6 r180; Top Overlay "E28(2G4M12S)" at 15.353,-13.693 h1.6 r180; Top Overlay "GND" at 16.75,-2.136 h1 r180; Top Overlay "DIO3" at 16.75,-3.406 h1 r180; Top Overlay "DIO2" at 16.75,-4.803 h1 r180; Top Overlay "DIO1" at 16.75,-5.946 h1 r180; Top Overlay "BUSY" at 16.75,-7.216 h1 r180; Top Overlay "NRESET" at 16.75,-8.613 h1 r180; Top Overlay "GND" at 16.75,-9.883 h1 r180; Top Overlay "GND" at 6.336,-9.883 h1 r180; Top Overlay "NSS_CTS" at 8.241,-8.613 h1 r180; Top Overlay "SCK_RTS" at 8.241,-7.216 h1 r180; Top Overlay "MOSI_RX" at 8.241,-6.073 h1 r180; Top Overlay "MISO_TX" at 8.241,-4.803 h1 r180; Top Overlay "GND" at 6.336,-3.533 h1 r180; Top Overlay "VCC" at 6.336,-2.136 h1 r180
U8: Top Overlay "ANT" at 74.034,-19.281 h1.6 r180; Top Overlay "E28(2G4M12S)" at 77.59,-13.566 h1.6 r180; Top Overlay "GND" at 78.987,-2.009 h1 r180; Top Overlay "DIO3" at 78.987,-3.279 h1 r180; Top Overlay "DIO2" at 78.987,-4.676 h1 r180; Top Overlay "DIO1" at 78.987,-5.819 h1 r180; Top Overlay "BUSY" at 78.987,-7.089 h1 r180; Top Overlay "NRESET" at 78.987,-8.486 h1 r180; Top Overlay "GND" at 78.987,-9.756 h1 r180; Top Overlay "GND" at 68.573,-9.756 h1 r180; Top Overlay "NSS_CTS" at 70.478,-8.486 h1 r180; Top Overlay "SCK_RTS" at 70.478,-7.089 h1 r180; Top Overlay "MOSI_RX" at 70.478,-5.946 h1 r180; Top Overlay "MISO_TX" at 70.478,-4.676 h1 r180; Top Overlay "GND" at 68.573,-3.406 h1 r180; Top Overlay "VCC" at 68.573,-2.009 h1 r180